# EAGLE board powerOneAmp_v2 (EAGLE 9.6.2)

Size 57 x 68.5 mm. Coordinates in mm from the lower left corner, seen from the top.
Outline: 0,0 57,0 57,68.5 0,68.5 0,0
Copper layers (1*16): Top 0.035mm / dielectric 1.5mm / Bottom 0.035mm
Design rules "default": minimum track width 6mil, minimum drill 0.35mm, track to track 6mil, track to pad 6mil, pad to pad 6mil, via to via 6mil, smd to smd 6mil, copper to edge 40mil, drill to drill 6mil, minimum pad ring 10mil, minimum via ring 8mil, stop-mask expansion 4mil, vias tented up to drill 0mil, thermal gap 10mil
Net classes: 0 GND: width 1.016 mm

## Footprints (pad centres in the part's own frame; a part is rotated, then mirrored left to right if it is on the bottom)
VREG_LM2596S-3.3 = smd 2.16 x 1.07: 1 -6.545,3.4; 2 -6.545,1.7; 3 -6.545,0; 4 -6.545,-1.7; 5 -6.545,-3.4 | smd 5.08 x 8.33: 6 3.175,0 | smd 1.91 x 10.8: 7 6.67,0
0603 = smd 1.1 x 1: 1 -0.85,0; 2 0.85,0
PANASONIC_D = smd 3 x 1.4: + 2.4,0; - -2.4,0
LED-0603 = smd 1 x 1: A -0.877,0; C 0.877,0
DIODE-1N4148 = drill 0.9 pad 1.88: A -3.81,0; C 3.81,0
POWER_JACK_PTH = drill 2.997 pad 4.318: GND 0,7.7; GNDBREAK 4.7,10.7; PWR 0,13.7
1X02 = drill 1.016 pad 1.88: 1 0,0; 2 2.54,0
SWITCH_SPDT_PTH_11.6X4.0MM = drill 1.016 pad 1.88: 1 0,2.54; 2 0,0; 3 0,-2.54
SOT223 = smd 1.219 x 2.235: 1 -2.311,-3.099; 2 0,-3.099; 3 2.311,-3.099 | smd 3.6 x 2.2: 4 0,3.099
SOD-323 = smd 1.52 x 3.2: A 6.1,0; C 0,0
INDUCTOR_4X4MM = smd 5.4 x 2.9: P$1 0,-4.95; P$2 0,4.95

## Placement (x,y rotation side)
3V  LM2596S-3.3  [VREG_LM2596S-3.3]  42,49 180 top
5V  LM2596S-3.3  [VREG_LM2596S-3.3]  42,61.5 180 top
C1  0.1uF  [0603]  4.35,40.3 90 top
C2  0.1uF  [0603]  4.35,36.49 90 top
C3  1.0uF  [0603]  4.35,32.68 90 top
C4  100uF  [PANASONIC_D]  28.02,54.66 0 top
C5  47uF  [PANASONIC_D]  15.34,51.7 90 top
C6  47uF  [PANASONIC_D]  15.34,42.81 90 top
C7  22uF  [PANASONIC_D]  15.34,33.92 90 top
C8  33uF  [PANASONIC_D]  15.34,25.03 90 top
D1  RED  [LED-0603]  4.35,25.06 90 top
D2  200mA/100V/1V  [DIODE-1N4148]  4.35,47.92 90 top
FRAME1  FRAME-LETTER  [CREATIVE_COMMONS]  -80.01,6.55 0 top  (outside the outline)
J1  POWER_JACK  [POWER_JACK_PTH]  0,61.16 270 top
J2  [1X02]  52.78,12.63 180 top
J3  [1X02]  7.6,12.63 180 top
J5  [1X02]  52.78,2 180 top
J5_S1  [SWITCH_SPDT_PTH_11.6X4.0MM]  12.04,17.78 90 top
J5_S2  [SWITCH_SPDT_PTH_11.6X4.0MM]  27.54,17.66 90 top
J5_S3  [SWITCH_SPDT_PTH_11.6X4.0MM]  54.04,20.96 0 top
J5_S4  [SWITCH_SPDT_PTH_11.6X4.0MM]  46.42,20.96 0 top
J6  [1X02]  7.6,2 180 top
J6_S6  [SWITCH_SPDT_PTH_11.6X4.0MM]  38.68,20.84 0 top
J6_S7  [SWITCH_SPDT_PTH_11.6X4.0MM]  54.06,34.84 0 top
J6_S8  [SWITCH_SPDT_PTH_11.6X4.0MM]  46.44,34.84 0 top
J6_S9  [SWITCH_SPDT_PTH_11.6X4.0MM]  38.82,34.84 0 top
R1  470  [0603]  4.35,28.87 90 top
S5  [SWITCH_SPDT_PTH_11.6X4.0MM]  20.09,61.39 0 top
U$1  V_REG_LD1117VXXLD1117-SMD  [SOT223]  43.55,9.37 0 top
U$2  V_REG_LD1117VXXLD1117-SMD  [SOT223]  33.74,9.37 0 top
U$3  SS34_214AB  [SOD-323]  25,12.5 270 top
U$4  SS34_214AB  [SOD-323]  16,12.5 270 top
U$5  IN_33UH_3.8A_SMD  [INDUCTOR_4X4MM]  27.5,28 0 top
U$6  IN_33UH_3.8A_SMD  [INDUCTOR_4X4MM]  27.5,43 0 top

## Library data of the parts
3V 5V = LM2596S-3.3; AVAILABILITY: In Stock; DESCRIPTION: SIMPLE SWITCHER&reg; 4.5V to 40V, 3A Low Component Count Step-Down Regulator 5-DDPAK/TO-263; MF: Texas Instruments; MP: LM2596S-3.3; PACKAGE: TO-263-5 Texas Instruments; PRICE: None; PURCHASE-URL: https://pricing.snapeda.com/search/part/LM2596S-3.3/?ref=eda
C1 C2 = SparkFun-Capacitors; PROD_ID: CAP-08604
C3 = SparkFun-Capacitors; PROD_ID: CAP-00868
C4 = SparkFun-Capacitors; PROD_ID: CAP-12547
C5-C8 = SparkFun-Capacitors; PROD_ID: CAP-08478
D1 = SparkFun-LED; PROD_ID: DIO-00819
D2 = SparkFun-DiscreteSemi; PROD_ID: DIO-08378
FRAME1 = SparkFun-Aesthetics
J1 = SparkFun-Connectors; PROD_ID: CONN-08197
J2 J3 J5 J6 = SparkFun-Connectors
J5_S1-J5_S4 J6_S6-J6_S9 S5 = SparkFun-Switches; PROD_ID: SWCH-08261; SF_SKU: COM-00102
R1 = SparkFun-Resistors; PROD_ID: RES-07869
U$1 U$2 = SparkFun-IC-Power; PROD_ID: VREG-13917
U$3 U$4 = SV_Diode
U$5 U$6 = SV_Inductors

## Nets
3.3V_1A_OUT: C3.1 J5_S2.1 J6_S7.1 U$2.2
3.3V_3A_OUT: 3V.4 C5.+ J5_S4.1 J6_S9.1 U$4.C U$6.P$2
5V_1A_OUT: C2.1 C4.+ J5_S1.1 J6_S6.1 U$1.2 U$2.3
5V_3A_OUT: 5V.4 C6.+ J5_S3.1 J6_S8.1 U$3.C U$5.P$2
9V_IN: 3V.1 5V.1 C7.+ C8.+ D2.A S5.2
GND: 3V.3 3V.5 3V.6 3V.7 5V.3 5V.5 5V.6 5V.7 C1.2 C2.2 C3.2 C4.- C5.- C6.- C7.- C8.- J1.GND J1.GNDBREAK J2.1 J3.1 J5.1 J6.1 R1.1 U$1.1 U$2.1 U$3.A U$4.A
N$1: J3.2 J5.2 J5_S1.2 J5_S2.2 J5_S3.2 J5_S4.2
N$2: D1.C R1.2
N$3: C1.1 D1.A D2.C U$1.3
N$5: J1.PWR S5.1
N$7: 5V.2 U$5.P$1
N$8: J2.2 J6.2 J6_S6.2 J6_S7.2 J6_S8.2 J6_S9.2
N$10: 3V.2 U$6.P$1

## Tracks (layer width: path | path; a pad name or v marks a point on that pad's centre or on a via)
3.3V_1A_OUT  (3 unrouted)
3.3V_3A_OUT  (5 unrouted)
5V_1A_OUT  (5 unrouted)
5V_3A_OUT  (5 unrouted)
9V_IN  (5 unrouted)
GND  (26 unrouted)
N$1  (5 unrouted)
N$2  (1 unrouted)
N$3  (3 unrouted)
N$5  (1 unrouted)
N$7  (1 unrouted)
N$8  (5 unrouted)
N$10  (1 unrouted)

## Text on the board
tNames: ON | OFF | L-3.3V-3A | L-5V-3A | L-3.3V-1A | L-5V-1A | R-3.3V-3A | R-5V-3A | R-5V-1A | R-3.3V-1A | R+ | R- | L+ | L-